# Altium PCB GSH_Bed v1.0.PcbDoc (part 6 of 6)
Units mil, origin at the board's own origin, x right, y up, seen from the top; angles counter-clockwise.
Board outline 4724.41 x 4921.3 mil, 2 copper layers (Top Layer, Bottom Layer); 2 components, 3 nets, 5 pads, 0 vias.
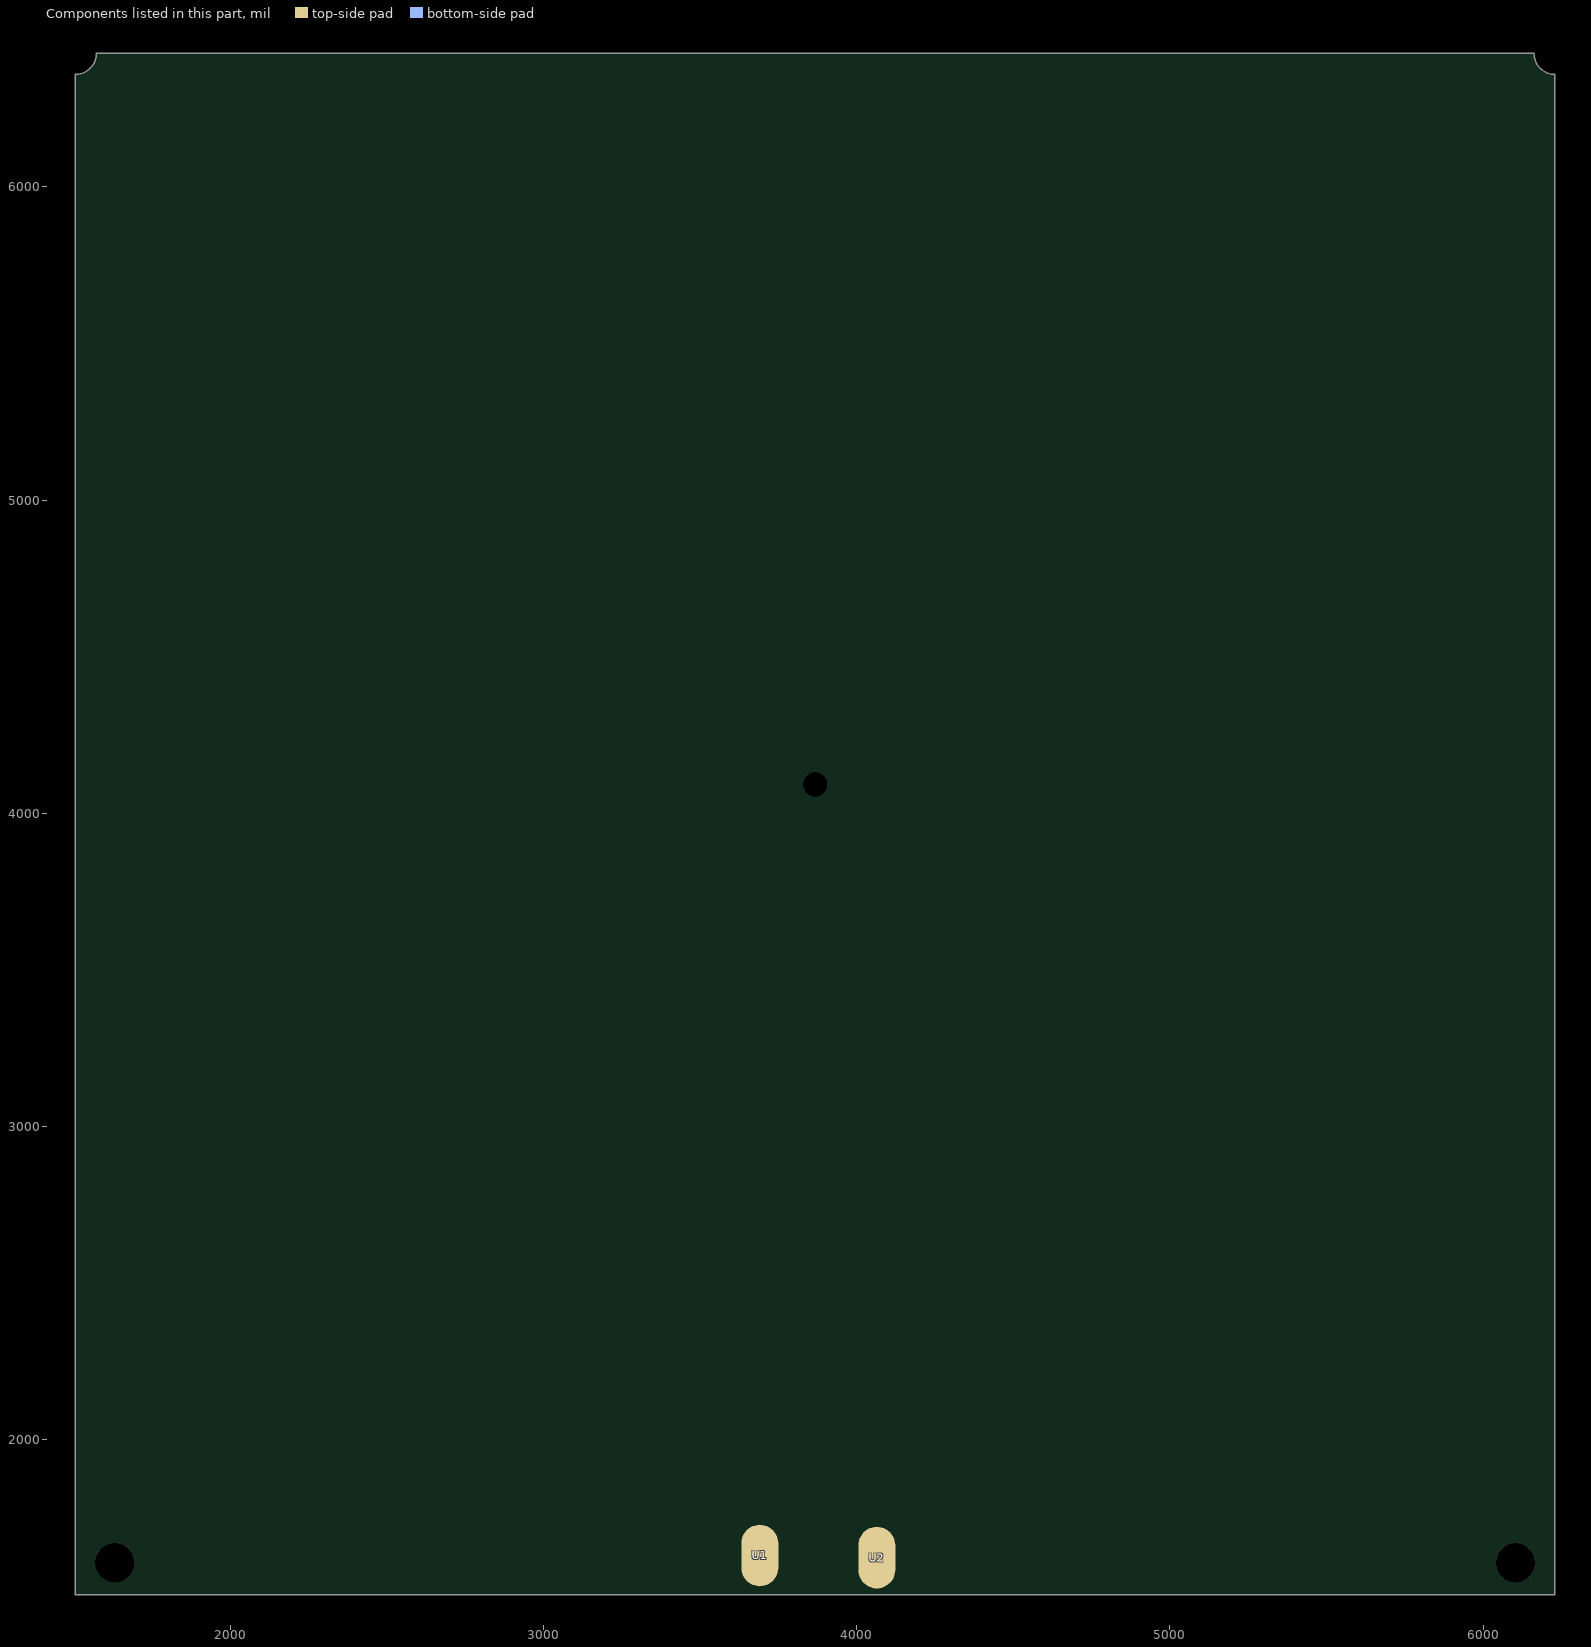
[diagram p6: the components of this part, seen from the top]

## Nets (pads, with @x,y where several pads share a name; then routed paths per layer and width w, separated by ;. In a path a pad name is that pad's centre, name@x,y a point inside that pad or via, vN(x,y) a via of type N, cw(c..) or ccw(c..) an arc to the next point about the centre after c; other vN are vias at no path point) (continued)
copper on no net: (continued)
  Top Layer w25.59: 5550.23,2788.33 5514.8,2788.33 5514.8,2823.77 5550.23,2823.77 5550.23,2894.62 5514.8,2894.62 5514.8,2859.2 5479.36,2859.2 5479.36,2894.62 5443.93,2894.62 5443.93,2823.77 5479.36,2823.77 5479.36,2788.33 5443.93,2788.33 5373.06,2788.33 5373.06,2823.77 5408.5,2823.77 5408.5,2894.64 5373.06,2894.64 5373.06,2859.2 5337.64,2859.2 5337.64,2894.64 5302.2,2894.64 5302.2,2823.77 5337.64,2823.77 5337.64,2788.34 5302.2,2788.34 5302.2,2717.47 5337.64,2717.47 5337.64,2752.9 5408.5,2752.9 5408.5,2717.47 5373.06,2717.47 5373.06,2682.04 5408.5,2682.04 5408.5,2646.6 5337.64,2646.6 5337.64,2682.04 5302.2,2682.04 5302.2,2646.6 5266.76,2646.6 5266.77,2682.03 5231.33,2682.03 5231.33,2646.6 5160.47,2646.6 5160.47,2682.03 5195.9,2682.03 5195.9,2717.47 5160.47,2717.47 5160.47,2752.9 5231.33,2752.9 5231.33,2717.47 5266.77,2717.47 5266.77,2788.33 5231.34,2788.33 5231.34,2823.77 5266.77,2823.77 5266.77,2894.64 5231.34,2894.64 5231.34,2859.2 5195.9,2859.2 5195.9,2894.64 5160.47,2894.64 5160.47,2823.77 5195.9,2823.77 5195.9,2788.34 5160.47,2788.34 5089.6,2788.34 5089.6,2823.78 5125.04,2823.78 5125.04,2894.64 5089.6,2894.64 5089.6,2859.21 5054.17,2859.21 5054.17,2894.64 5018.74,2894.64 5018.74,2823.78 5054.17,2823.78 5054.17,2788.34 5018.74,2788.34 5018.74,2717.48 5054.18,2717.48 5054.18,2752.91 5125.04,2752.91 5125.04,2717.48 5089.61,2717.48 5089.61,2682.04 5125.04,2682.04 5125.04,2646.61 5054.18,2646.61 5054.18,2682.04 5018.73,2682.04 5018.73,2646.61 5018.73,2611.18 5054.17,2611.18 5054.17,2575.74 5018.73,2575.74 5018.73,2504.87 5054.17,2504.87 5054.17,2540.3 5089.6,2540.3 5089.6,2504.87 5125.04,2504.87 5125.04,2575.74 5089.6,2575.74 5089.6,2611.17 5160.47,2611.17 5160.47,2575.74 5195.9,2575.74 5195.9,2611.17 5266.77,2611.17 5266.77,2575.74 5231.34,2575.74 5231.34,2540.31 5266.77,2540.31 5266.77,2504.87 5195.9,2504.87 5195.9,2540.31 5160.47,2540.31 5160.47,2469.44 5160.47,2434.01 5195.9,2434.01 5195.9,2469.45 5266.76,2469.45 5266.76,2434.01 5231.33,2434.01 5231.33,2398.57 5266.76,2398.57 5266.76,2363.14 5195.9,2363.14 5195.9,2398.57 5160.46,2398.57 5160.46,2363.14 5089.59,2363.14 5089.59,2398.58 5125.03,2398.58 5125.03,2469.45 5089.59,2469.45 5089.59,2434.01 5054.16,2434.01 5054.16,2469.45 5018.72,2469.45 5018.72,2398.58 5054.16,2398.58 5054.16,2363.15 5018.73,2363.15 5018.72,2292.28 5054.16,2292.28 5054.16,2327.72 5125.02,2327.72 5125.02,2292.28 5089.59,2292.28 5089.59,2256.85 5125.02,2256.85 5125.02,2221.42 5054.16,2221.42 5054.16,2256.85 5018.72,2256.85 5018.72,2185.99 5054.15,2185.98 5054.15,2150.54 5018.72,2150.54 5018.72,2079.68 5054.15,2079.68 5054.15,2115.11 5089.59,2115.11 5089.59,2079.68 5125.02,2079.68 5125.02,2150.54 5089.59,2150.54 5089.59,2185.98 5125.02,2185.98 5195.89,2185.98 5195.89,2150.54 5160.45,2150.54 5160.45,2079.67 5195.89,2079.67 5195.89,2115.11 5231.32,2115.11 5231.32,2079.67 5266.76,2079.67 5266.76,2150.54 5231.32,2150.54 5231.32,2185.97 5266.75,2185.97 5266.75,2256.84 5231.32,2256.84 5231.32,2221.41 5160.45,2221.41 5160.45,2256.84 5195.89,2256.84 5195.89,2292.27 5160.45,2292.27 5160.45,2327.71 5231.32,2327.71 5231.32,2292.27 5266.76,2292.27 5266.76,2327.71 5302.19,2327.71 5337.63,2327.71 5337.63,2292.27 5302.19,2292.27 5302.19,2221.4 5337.63,2221.4 5337.63,2256.84 5373.06,2256.84 5373.06,2221.4 5408.49,2221.4 5408.49,2292.27 5373.06,2292.27 5373.06,2327.7 5443.93,2327.7 5443.93,2292.27 5479.35,2292.27 5479.35,2327.71 5550.22,2327.71 5550.22,2292.27 5514.79,2292.27 5514.79,2256.84 5550.22,2256.84 5550.22,2221.4 5479.35,2221.4 5479.35,2256.84 5443.92,2256.84 5443.92,2185.97 5443.92,2150.54 5479.35,2150.54 5479.35,2185.97 5550.21,2185.97 5550.21,2150.54 5514.78,2150.54 5514.78,2115.11 5550.21,2115.11 5550.21,2079.67 5479.35,2079.67 5479.35,2115.11 5443.91,2115.11 5443.91,2079.67 5373.05,2079.67 5373.05,2115.11 5408.48,2115.11 5408.48,2185.97 5373.05,2185.97 5373.05,2150.54 5337.61,2150.54 5337.61,2185.97 5302.18,2185.97 5302.18,2115.11 5337.61,2115.11 5337.61,2079.68 5302.18,2079.68 5302.18,2044.25 5337.62,2044.25 5337.62,2008.81 5302.18,2008.81 5302.18,1937.95 5337.62,1937.95 5337.62,1973.38 5373.05,1973.38 5373.05,1937.95 5408.48,1937.95 5408.48,2008.81 5373.05,2008.81 5373.05,2044.24 5443.91,2044.24 5443.91,2008.81 5479.35,2008.81 5479.35,2044.24 5550.21,2044.24 5550.21,2008.81 5514.78,2008.81 5514.78,1973.38 5550.21,1973.38 5550.21,1937.95 5479.35,1937.95 5479.35,1973.38 5443.91,1973.38 5443.91,1902.51 5443.91,1867.08 5479.34,1867.08 5479.34,1902.52 5550.2,1902.52 5550.2,1867.08 5514.77,1867.08 5514.77,1831.65 5550.2,1831.65 5550.2,1796.21 5479.34,1796.21 5479.34,1831.65 5443.9,1831.65 5443.9,1796.21 5373.04,1796.21 5373.04,1831.65 5408.47,1831.65 5408.47,1902.52 5373.04,1902.52 5373.04,1867.09 5337.61,1867.09 5337.61,1902.52 5302.17,1902.52 5302.17,1831.65 5337.61,1831.65 5337.61,1796.22 5266.74,1796.22 5266.74,1831.65 5231.31,1831.65 5231.31,1796.22 5160.44,1796.22 5160.44,1831.65 5195.88,1831.65 5195.88,1867.09 5160.44,1867.09 5160.44,1902.52 5231.31,1902.52 5231.31,1867.09 5266.75,1867.09 5266.75,1937.95 5231.31,1937.95 5231.31,1973.39 5266.75,1973.39 5266.75,2044.25 5231.31,2044.25 5231.31,2008.82 5195.88,2008.82 5195.88,2044.25 5160.44,2044.25 5160.44,1973.39 5195.88,1973.39 5195.88,1937.95 5160.45,1937.95 5089.58,1937.95 5089.58,1973.39 5125.01,1973.39 5125.01,2044.26 5089.58,2044.26 5089.58,2008.83 5054.15,2008.83 5054.15,2044.26 5018.72,2044.26 5018.72,1973.39 5054.15,1973.39 5054.15,1937.96 5018.72,1937.96 5018.72,1867.1 5054.15,1867.1 5054.15,1902.53 5125.01,1902.53 5125.01,1867.1 5089.58,1867.1 5089.58,1831.66 5125.01,1831.66 5125.01,1796.23 5054.15,1796.23 5054.15,1831.66 5018.72,1831.66 5018.72,1796.23 4983.28,1796.23 4947.85,1796.23 4947.85,1831.67 4983.28,1831.67 4983.28,1902.53 4947.85,1902.53 4947.85,1867.1 4912.42,1867.1 4912.42,1902.53 4876.98,1902.53 4876.98,1831.67 4912.42,1831.67 4912.42,1796.23 4841.55,1796.23 4841.55,1831.67 4806.11,1831.67 4806.11,1796.23 4735.25,1796.23 4735.25,1831.67 4770.68,1831.67 4770.68,1867.1 4735.25,1867.1 4735.25,1902.53 4806.11,1902.53 4806.11,1867.1 4841.55,1867.1 4841.55,1937.96 4841.55,1973.39 4806.12,1973.39 4806.12,1937.96 4735.26,1937.96 4735.26,1973.39 4770.69,1973.39 4770.69,2008.83 4735.26,2008.83 4735.26,2044.26 4806.12,2044.26 4806.12,2008.83 4841.56,2008.83 4841.56,2044.26 4912.43,2044.26 4912.43,2008.82 4876.99,2008.82 4876.99,1937.96 4912.43,1937.96 4912.43,1973.39 4947.85,1973.39 4947.85,1937.96 4983.29,1937.96 4983.29,2008.82 4947.85,2008.82 4947.85,2044.26 4983.29,2044.25 4983.29,2115.12 4947.85,2115.12 4947.85,2079.69 4877,2079.69 4877,2115.12 4912.43,2115.12 4912.43,2150.55 4877,2150.55 4877,2185.99 4947.85,2185.99 4947.85,2150.55 4983.3,2150.55 4983.3,2221.42 4947.86,2221.42 4947.86,2256.86 4983.3,2256.86 4983.3,2327.72 4947.86,2327.72 4947.86,2292.29 4912.43,2292.29 4912.43,2327.72 4877,2327.72 4877,2256.86 4912.43,2256.86 4912.43,2221.43 4877,2221.43 4806.13,2221.43 4806.13,2256.87 4841.57,2256.87 4841.57,2327.73 4806.13,2327.73 4806.13,2292.3 4770.7,2292.3 4770.7,2327.73 4735.26,2327.73 4735.26,2256.87 4770.7,2256.87 4770.7,2221.43 4735.27,2221.43 4735.27,2150.56 4770.7,2150.56 4770.7,2186 4841.57,2186 4841.57,2150.56 4806.13,2150.56 4806.13,2115.13 4841.57,2115.13 4841.57,2079.7 4770.7,2079.7 4770.7,2115.13 4735.26,2115.13 4735.26,2079.7 4699.83,2079.7 4699.83,2115.13 4664.4,2115.13 4664.4,2079.69 4593.53,2079.69 4593.53,2115.13 4628.96,2115.13 4628.96,2150.56 4593.53,2150.56 4593.53,2186 4664.4,2186 4664.4,2150.56 4699.84,2150.56 4699.84,2221.43 4664.4,2221.43 4664.4,2256.87 4699.84,2256.87 4699.84,2327.73 4664.4,2327.73 4664.4,2292.3 4628.97,2292.3 4628.97,2327.73 4593.53,2327.73 4593.53,2256.87 4628.97,2256.87 4628.97,2221.43 4593.54,2221.43 4522.67,2221.43 4522.67,2256.87 4558.1,2256.87 4558.1,2327.74 4522.67,2327.74 4522.67,2292.31 4487.24,2292.31 4487.24,2327.74 4451.81,2327.74 4451.81,2256.87 4487.24,2256.87 4487.24,2221.44 4451.81,2221.44 4451.81,2150.57 4487.24,2150.57 4487.24,2186.01 4558.1,2186.01 4558.1,2150.57 4522.68,2150.57 4522.68,2115.14 4558.1,2115.14 4558.1,2079.7 4487.24,2079.7 4487.24,2115.14 4451.8,2115.14 4451.8,2079.7 4451.8,2044.27 4487.23,2044.27 4487.23,2008.83 4451.8,2008.83 4451.8,1937.97 4487.23,1937.97 4487.23,1973.4 4522.67,1973.4 4522.67,1937.97 4558.1,1937.97 4558.1,2008.83 4522.67,2008.83 4522.67,2044.26 4593.53,2044.26 4593.53,2008.83 4628.97,2008.83 4628.97,2044.27 4699.83,2044.27 4699.83,2008.83 4664.4,2008.83 4664.4,1973.4 4699.83,1973.4 4699.83,1937.97 4628.97,1937.97 4628.97,1973.4 4593.53,1973.4 4593.53,1902.54 4593.53,1867.11 4628.96,1867.11 4628.96,1902.54 4699.83,1902.54 4699.83,1867.11 4664.4,1867.11 4664.4,1831.67 4699.83,1831.67 4699.83,1796.24 4628.96,1796.24 4628.96,1831.67 4593.52,1831.67 4593.52,1796.24 4522.66,1796.24 4522.66,1831.68 4558.09,1831.68 4558.09,1902.54 4522.66,1902.54 4522.66,1867.11 4487.23,1867.11 4487.23,1902.54 4451.79,1902.54 4451.79,1831.68 4487.23,1831.68 4487.23,1796.24 4416.36,1796.25 4416.36,1831.68 4380.93,1831.68 4380.93,1796.24 4310.07,1796.24 4310.07,1831.68 4345.5,1831.68 4345.5,1867.11 4310.07,1867.11 4310.07,1902.55 4380.93,1902.55 4380.93,1867.11 4416.37,1867.11 4416.37,1937.97 4380.93,1937.97 4380.93,1973.41 4416.37,1973.41 4416.37,2044.28 4380.93,2044.28 4380.93,2008.85 4345.5,2008.85 4345.5,2044.28 4310.07,2044.28 4310.07,1973.41 4345.5,1973.41 4345.5,1937.98 4310.07,1937.98 4239.2,1937.98 4239.2,1973.42 4274.64,1973.42 4274.64,2044.28 4239.2,2044.28 4239.2,2008.85 4203.77,2008.85 4203.77,2044.28 4168.33,2044.28 4168.33,1973.42 4203.77,1973.42 4203.77,1937.98 4168.34,1937.98 4168.34,1867.12 4203.77,1867.12 4203.77,1902.56 4274.64,1902.56 4274.64,1867.12 4239.2,1867.12 4239.2,1831.69 4274.64,1831.69 4274.64,1796.25 4203.77,1796.25 4203.77,1831.69 4168.33,1831.69 4168.33,1796.25 4132.9,1796.25 4097.47,1796.25 4097.47,1831.69 4132.9,1831.69 4132.9,1902.56 4097.47,1902.56 4097.47,1867.12 4062.03,1867.12 4062.03,1902.56 4026.6,1902.56 4026.6,1831.69 4062.03,1831.69 4062.03,1796.26 3991.17,1796.26 3991.17,1831.69 3955.73,1831.69 3955.73,1796.26 3884.87,1796.26 3884.87,1831.69 3920.3,1831.69 3920.3,1867.12 3884.87,1867.12 3884.87,1902.56 3955.73,1902.56 3955.73,1867.12 3991.17,1867.12 3991.17,1937.99 3991.17,1973.42 3955.74,1973.42 3955.74,1937.98 3884.88,1937.98 3884.88,1973.42 3920.31,1973.42 3920.31,2008.85 3884.88,2008.85 3884.88,2044.29 3955.74,2044.29 3955.74,2008.85 3991.18,2008.85 3991.18,2044.29 4062.05,2044.29 4062.05,2008.85 4026.61,2008.85 4026.61,1937.98 4062.05,1937.98 4062.05,1973.41 4097.47,1973.41 4097.47,1937.98 4132.91,1937.98 4132.91,2008.85 4097.47,2008.85 4097.47,2044.28 4132.91,2044.28 4132.91,2079.71 4097.47,2079.71 4097.47,2115.15 4132.91,2115.15 4132.91,2186.02 4097.47,2186.02 4097.47,2150.58 4062.04,2150.58 4062.04,2186.02 4026.61,2186.02 4026.61,2115.15 4062.04,2115.15 4062.04,2079.72 3991.18,2079.72 3991.18,2115.15 3955.74,2115.15 3955.74,2079.71 3884.88,2079.71 3884.88,2115.15 3920.31,2115.15 3920.31,2150.58 3884.88,2150.58 3884.88,2186.02 3955.74,2186.02 3955.74,2150.58 3991.18,2150.58 3991.18,2221.45 3991.18,2256.88 3955.75,2256.88 3955.75,2221.45 3884.88,2221.45 3884.88,2256.88 3920.31,2256.88 3920.31,2292.31 3884.88,2292.31 3884.88,2327.74 3955.75,2327.74 3955.75,2292.31 3991.18,2292.31 3991.18,2327.74 4062.05,2327.74 4062.05,2292.31 4026.61,2292.31 4026.61,2221.45 4062.05,2221.45 4062.05,2256.88 4097.48,2256.88 4097.48,2221.45 4132.92,2221.45 4132.92,2292.31 4097.48,2292.31 4097.48,2327.74 4168.35,2327.74 4168.35,2292.31 4203.78,2292.31 4203.78,2327.74 4274.64,2327.74 4274.64,2292.31 4239.21,2292.31 4239.21,2256.88 4274.64,2256.88 4274.64,2221.44 4203.78,2221.44 4203.78,2256.88 4168.34,2256.88 4168.34,2186.01 4203.78,2186.01 4203.78,2150.57 4168.34,2150.57 4168.34,2079.71 4203.78,2079.71 4203.78,2115.14 4239.21,2115.14 4239.21,2079.71 4274.64,2079.71 4274.64,2150.57 4239.21,2150.57 4239.21,2186 4274.64,2186 4345.51,2186 4345.51,2150.56 4310.07,2150.56 4310.07,2079.7 4345.51,2079.7 4345.51,2115.13 4380.94,2115.13 4380.94,2079.7 4416.38,2079.7 4416.38,2150.56 4380.94,2150.56 4380.94,2186 4416.37,2186 4416.37,2256.87 4380.94,2256.87 4380.94,2221.43 4310.07,2221.43 4310.07,2256.87 4345.51,2256.87 4345.51,2292.3 4310.07,2292.3 4310.07,2327.73 4380.94,2327.73 4380.94,2292.3 4416.38,2292.3 4416.38,2327.73 4416.39,2398.59 4380.95,2398.59 4380.95,2363.16 4310.09,2363.16 4310.09,2398.59 4345.52,2398.59 4345.52,2434.03 4310.09,2434.03 4310.09,2469.47 4380.95,2469.47 4380.95,2434.03 4416.39,2434.03 4416.39,2504.9 4380.96,2504.9 4380.96,2540.34 4416.39,2540.34 4416.39,2611.2 4380.96,2611.2 4380.96,2575.77 4345.52,2575.77 4345.52,2611.2 4310.09,2611.2 4310.09,2540.34 4345.52,2540.34 4345.52,2504.9 4310.09,2504.9 4239.22,2504.9 4239.22,2540.34 4274.66,2540.34 4274.66,2611.21 4239.22,2611.21 4239.22,2575.78 4203.79,2575.78 4203.79,2611.21 4168.36,2611.21 4168.36,2540.34 4203.79,2540.34 4203.79,2504.91 4168.36,2504.91 4168.36,2434.04 4203.79,2434.04 4203.79,2469.48 4274.66,2469.48 4274.66,2434.04 4239.22,2434.04 4239.22,2398.61 4274.66,2398.61 4274.66,2363.17 4203.79,2363.17 4203.79,2398.61 4168.35,2398.61 4168.35,2363.17 4132.92,2363.17 4097.49,2363.17 4097.49,2398.61 4132.92,2398.61 4132.92,2469.48 4097.49,2469.48 4097.49,2434.04 4062.05,2434.04 4062.05,2469.48 4026.62,2469.48 4026.62,2398.61 4062.05,2398.61 4062.05,2363.18 3991.19,2363.18 3991.19,2398.61 3955.76,2398.61 3955.76,2363.18 3884.89,2363.18 3884.89,2398.61 3920.32,2398.61 3920.32,2434.04 3884.89,2434.04 3884.89,2469.48 3955.76,2469.48 3955.76,2434.04 3991.2,2434.04 3991.2,2504.91 3991.2,2540.34 3955.76,2540.34 3955.76,2504.91 3884.9,2504.91 3884.9,2540.34 3920.33,2540.34 3920.33,2575.78 3884.9,2575.78 3884.9,2611.21 3955.76,2611.21 3955.76,2575.78 3991.2,2575.78 3991.2,2611.21 4062.06,2611.21 4062.06,2575.77 4026.63,2575.77 4026.63,2504.91 4062.06,2504.91 4062.06,2540.34 4097.5,2540.34 4097.5,2504.91 4132.93,2504.91 4132.93,2575.77 4097.5,2575.77 4097.5,2611.21 4132.93,2611.2 4132.93,2646.64 4097.49,2646.64 4097.49,2682.08 4132.93,2682.08 4132.93,2752.94 4097.49,2752.94 4097.49,2717.51 4062.06,2717.51 4062.06,2752.94 4026.63,2752.94 4026.63,2682.08 4062.06,2682.08 4062.06,2646.64 3991.2,2646.64 3991.2,2682.07 3955.76,2682.07 3955.76,2646.64 3884.9,2646.64 3884.9,2682.07 3920.33,2682.07 3920.33,2717.51 3884.9,2717.51 3884.9,2752.94 3955.76,2752.94 3955.76,2717.51 3991.2,2717.51 3991.2,2788.37 3991.2,2823.8 3955.76,2823.8 3955.76,2788.37 3884.91,2788.37 3884.91,2823.8 3920.34,2823.8 3920.34,2859.24 3884.91,2859.24 3884.91,2894.67 3955.76,2894.67 3955.76,2859.24 3991.2,2859.24 3991.2,2894.67 4062.07,2894.67 4062.07,2859.23 4026.64,2859.23 4026.64,2788.37 4062.07,2788.37 4062.07,2823.8 4097.5,2823.8 4097.5,2788.37 4132.94,2788.37 4132.94,2859.23 4097.5,2859.23 4097.5,2894.66 4168.37,2894.66 4168.37,2859.23 4203.8,2859.23 4203.8,2894.66 4274.67,2894.66 4274.67,2859.23 4239.24,2859.23 4239.24,2823.8 4274.67,2823.8 4274.67,2788.36 4203.8,2788.36 4203.8,2823.8 4168.36,2823.8 4168.36,2752.94 4203.8,2752.93 4203.8,2717.49 4168.36,2717.49 4168.36,2646.63 4203.8,2646.63 4203.8,2682.06 4239.23,2682.06 4239.23,2646.63 4274.67,2646.63 4274.67,2717.49 4239.23,2717.49 4239.23,2752.93 4274.66,2752.93 4345.53,2752.93 4345.53,2717.49 4310.1,2717.49 4310.1,2646.62 4345.53,2646.62 4345.53,2682.06 4380.96,2682.06 4380.96,2646.62 4416.4,2646.62 4416.4,2717.49 4380.96,2717.49 4380.96,2752.92 4416.4,2752.92 4416.4,2823.79 4380.96,2823.79 4380.96,2788.36 4310.1,2788.36 4310.1,2823.79 4345.53,2823.79 4345.53,2859.22 4310.1,2859.22 4310.1,2894.65 4380.96,2894.65 4380.96,2859.22 4416.4,2859.22 4416.4,2894.65 4451.83,2894.65 4487.26,2894.65 4487.26,2859.22 4451.83,2859.22 4451.83,2788.35 4487.26,2788.35 4487.26,2823.78 4522.69,2823.78 4522.69,2788.35 4558.13,2788.35 4558.13,2859.22 4522.69,2859.22 4522.69,2894.65 4593.56,2894.65 4593.56,2859.22 4629,2859.22 4629,2894.65 4699.86,2894.65 4699.86,2859.22 4664.43,2859.22 4664.43,2823.78 4699.86,2823.78 4699.86,2788.35 4629,2788.35 4629,2823.78 4593.56,2823.78 4593.56,2752.92 4593.56,2717.49 4628.99,2717.49 4628.99,2752.92 4699.85,2752.92 4699.85,2717.49 4664.42,2717.49 4664.42,2682.05 4699.85,2682.05 4699.85,2646.62 4628.99,2646.62 4628.99,2682.05 4593.55,2682.05 4593.55,2646.62 4522.68,2646.62 4522.68,2682.06 4558.12,2682.06 4558.12,2752.92 4522.68,2752.92 4522.68,2717.49 4487.26,2717.49 4487.26,2752.92 4451.82,2752.92 4451.82,2682.06 4487.26,2682.06 4487.26,2646.62 4451.82,2646.63 4451.82,2575.76 4487.26,2575.76 4487.26,2611.19 4558.11,2611.19 4558.11,2575.76 4522.68,2575.76 4522.68,2540.33 4558.11,2540.33 4558.11,2504.89 4487.26,2504.89 4487.26,2540.33 4451.81,2540.33 4451.81,2469.46 4487.25,2469.46 4487.25,2434.02 4451.81,2434.02 4451.81,2363.16 4487.25,2363.16 4487.25,2398.59 4522.68,2398.59 4522.68,2363.16 4558.11,2363.16 4558.11,2434.02 4522.68,2434.02 4522.68,2469.45 4558.11,2469.45 4628.98,2469.45 4628.98,2434.01 4593.54,2434.01 4593.54,2363.15 4628.98,2363.15 4628.98,2398.58 4664.41,2398.58 4664.41,2363.15 4699.85,2363.15 4699.85,2434.01 4664.41,2434.01 4664.41,2469.45 4699.84,2469.45 4699.84,2540.32 4664.41,2540.32 4664.41,2504.88 4593.54,2504.88 4593.54,2540.32 4628.98,2540.32 4628.98,2575.75 4593.54,2575.75 4593.54,2611.18 4664.41,2611.18 4664.41,2575.75 4699.85,2575.75 4699.85,2611.18 4735.28,2611.18 4735.28,2575.75 4770.71,2575.75 4770.71,2611.18 4841.58,2611.18 4841.58,2575.75 4806.15,2575.75 4806.15,2540.32 4841.58,2540.32 4841.58,2504.88 4770.71,2504.88 4770.71,2540.32 4735.27,2540.32 4735.27,2469.45 4770.71,2469.45 4770.71,2434.01 4735.27,2434.01 4735.27,2363.15 4770.71,2363.15 4770.71,2398.58 4806.14,2398.58 4806.14,2363.15 4841.58,2363.15 4841.58,2434.01 4806.14,2434.01 4806.14,2469.45 4841.57,2469.45 4912.44,2469.45 4912.44,2434.01 4877.01,2434.01 4877.01,2363.14 4912.44,2363.14 4912.44,2398.57 4947.87,2398.57 4947.87,2363.14 4983.3,2363.14 4983.3,2434.01 4947.87,2434.01 4947.87,2469.45 4983.3,2469.45 4983.3,2540.31 4947.87,2540.31 4947.87,2504.87 4877.01,2504.87 4877.01,2540.31 4912.44,2540.31 4912.44,2575.74 4877.01,2575.74 4877.01,2611.18 4947.87,2611.18 4947.87,2575.74 4983.31,2575.74 4983.31,2611.18 4983.31,2646.61 4947.88,2646.61 4947.88,2682.05 4983.31,2682.05 4983.31,2752.91 4947.88,2752.91 4947.88,2717.48 4912.44,2717.48 4912.44,2752.91 4877.01,2752.91 4877.01,2682.05 4912.44,2682.05 4912.44,2646.62 4841.58,2646.62 4841.58,2682.05 4806.14,2682.05 4806.14,2646.61 4735.28,2646.61 4735.28,2682.05 4770.71,2682.05 4770.71,2717.48 4735.28,2717.48 4735.28,2752.91 4806.14,2752.91 4806.14,2717.48 4841.58,2717.48 4841.58,2788.35 4841.58,2823.78 4806.15,2823.78 4806.15,2788.34 4735.28,2788.34 4735.28,2823.78 4770.71,2823.78 4770.71,2859.21 4735.28,2859.21 4735.28,2894.64 4806.15,2894.64 4806.15,2859.21 4841.59,2859.21 4841.59,2894.64 4912.45,2894.64 4912.45,2859.2 4877.02,2859.2 4877.02,2788.34 4912.45,2788.34 4912.45,2823.77 4947.88,2823.77 4947.88,2788.34 4983.32,2788.34 4983.32,2859.2 4947.88,2859.2 4947.88,2894.64 4983.31,2894.64 4983.31,2930.07 4947.88,2930.07 4947.88,2965.5 4983.31,2965.5 4983.31,3036.37 4947.88,3036.37 4947.88,3000.94 4912.45,3000.94 4912.45,3036.37 4877.02,3036.37 4877.02,2965.5 4912.45,2965.5 4912.45,2930.07 4841.59,2930.07 4841.59,2965.5 4806.15,2965.5 4806.15,2930.07 4735.29,2930.07 4735.29,2965.5 4770.72,2965.5 4770.72,3000.93 4735.29,3000.93 4735.29,3036.37 4806.15,3036.37 4806.15,3000.93 4841.59,3000.93 4841.59,3071.8 4841.59,3107.23 4806.15,3107.23 4806.15,3071.8 4735.29,3071.8 4735.29,3107.23 4770.72,3107.23 4770.72,3142.67 4735.29,3142.67 4735.29,3178.1 4806.15,3178.1 4806.15,3142.67 4841.59,3142.67 4841.59,3178.1 4912.46,3178.1 4912.46,3142.66 4877.02,3142.66 4877.02,3071.8 4912.46,3071.8 4912.46,3107.23 4947.89,3107.23 4947.89,3071.8 4983.33,3071.8 4983.33,3142.66 4947.89,3142.66 4947.89,3178.1 4983.32,3178.09 4983.33,3248.96 4947.89,3248.96 4947.89,3213.53 4877.03,3213.53 4877.03,3248.96 4912.46,3248.96 4912.46,3284.39 4877.03,3284.39 4877.03,3319.82 4947.89,3319.82 4947.89,3284.39 4983.33,3284.39 4983.33,3355.26 4947.89,3355.26 4947.89,3390.7 4983.33,3390.7 4983.33,3461.56 4947.89,3461.56 4947.89,3426.13 4912.47,3426.13 4912.47,3461.56 4877.03,3461.56 4877.03,3390.7 4912.47,3390.7 4912.47,3355.26 4877.03,3355.26 4806.17,3355.26 4806.17,3390.7 4841.6,3390.7 4841.6,3461.57 4806.17,3461.57 4806.17,3426.13 4770.73,3426.13 4770.73,3461.57 4735.3,3461.57 4735.3,3390.7 4770.73,3390.7 4770.73,3355.27 4735.3,3355.27 4735.3,3284.4 4770.74,3284.4 4770.74,3319.84 4841.6,3319.84 4841.6,3284.4 4806.17,3284.4 4806.17,3248.97 4841.6,3248.97 4841.6,3213.54 4770.74,3213.54 4770.74,3248.97 4735.3,3248.97 4735.3,3213.54 4699.86,3213.54 4699.87,3248.97 4664.43,3248.97 4664.43,3213.53 4593.57,3213.53 4593.57,3248.97 4629,3248.97 4629,3284.4 4593.57,3284.4 4593.57,3319.84 4664.43,3319.84 4664.43,3284.4 4699.87,3284.4 4699.87,3355.26 4664.44,3355.26 4664.44,3390.7 4699.87,3390.7 4699.87,3461.57 4664.44,3461.57 4664.44,3426.14 4629.01,3426.14 4629.01,3461.57 4593.57,3461.57 4593.57,3390.7 4629.01,3390.7 4629.01,3355.27 4593.57,3355.27 4522.71,3355.27 4522.71,3390.71 4558.14,3390.71 4558.14,3461.57 4522.71,3461.57 4522.71,3426.14 4487.27,3426.14 4487.27,3461.57 4451.84,3461.57 4451.84,3390.71 4487.27,3390.71 4487.27,3355.28 4451.84,3355.28 4451.84,3284.41 4487.27,3284.41 4487.27,3319.84 4558.14,3319.84 4558.14,3284.41 4522.71,3284.41 4522.71,3248.98 4558.14,3248.98 4558.14,3213.54 4487.27,3213.54 4487.27,3248.98 4451.84,3248.98 4451.84,3213.54 4451.84,3178.11 4487.27,3178.11 4487.27,3142.67 4451.84,3142.67 4451.84,3071.81 4487.27,3071.81 4487.27,3107.24 4522.7,3107.24 4522.7,3071.81 4558.14,3071.81 4558.14,3142.67 4522.7,3142.67 4522.7,3178.1 4593.57,3178.1 4593.57,3142.67 4629.01,3142.67 4629.01,3178.11 4699.87,3178.11 4699.87,3142.67 4664.44,3142.67 4664.44,3107.24 4699.87,3107.24 4699.87,3071.81 4629.01,3071.81 4629.01,3107.24 4593.56,3107.24 4593.56,3036.37 4593.56,3000.94 4629,3000.94 4629,3036.38 4699.86,3036.38 4699.86,3000.94 4664.43,3000.94 4664.43,2965.51 4699.86,2965.51 4699.86,2930.07 4629,2930.07 4629,2965.51 4593.56,2965.51 4593.56,2930.07 4522.69,2930.07 4522.69,2965.51 4558.13,2965.51 4558.13,3036.38 4522.69,3036.38 4522.69,3000.95 4487.26,3000.95 4487.26,3036.38 4451.83,3036.38 4451.83,2965.51 4487.26,2965.51 4487.26,2930.08 4416.4,2930.08 4416.4,2965.51 4380.97,2965.51 4380.97,2930.08 4310.1,2930.08 4310.1,2965.51 4345.53,2965.51 4345.53,3000.95 4310.1,3000.95 4310.1,3036.38 4380.97,3036.38 4380.97,3000.95 4416.4,3000.95 4416.4,3071.81 4380.97,3071.81 4380.97,3107.25 4416.4,3107.25 4416.4,3178.12 4380.97,3178.12 4380.97,3142.69 4345.54,3142.69 4345.54,3178.12 4310.1,3178.12 4310.1,3107.25 4345.54,3107.25 4345.54,3071.82 4310.11,3071.82 4239.24,3071.82 4239.24,3107.26 4274.67,3107.26 4274.67,3178.12 4239.24,3178.12 4239.24,3142.69 4203.8,3142.69 4203.8,3178.12 4168.37,3178.12 4168.37,3107.26 4203.8,3107.26 4203.8,3071.82 4168.38,3071.82 4168.38,3000.96 4203.81,3000.96 4203.81,3036.39 4274.67,3036.39 4274.67,3000.96 4239.24,3000.96 4239.24,2965.52 4274.67,2965.52 4274.67,2930.09 4203.81,2930.09 4203.81,2965.52 4168.37,2965.52 4168.37,2930.09 4132.94,2930.09 4097.5,2930.09 4097.5,2965.53 4132.93,2965.53 4132.93,3036.39 4097.5,3036.39 4097.5,3000.96 4062.07,3000.96 4062.07,3036.39 4026.63,3036.39 4026.63,2965.53 4062.07,2965.53 4062.07,2930.09 3991.2,2930.09 3991.2,2965.53 3955.76,2965.53 3955.76,2930.09 3884.9,2930.09 3884.9,2965.53 3920.34,2965.53 3920.34,3000.96 3884.9,3000.96 3884.9,3036.39 3955.76,3036.39 3955.76,3000.96 3991.21,3000.96 3991.21,3071.83 3991.21,3107.26 3955.77,3107.26 3955.77,3071.82 3884.91,3071.82 3884.91,3107.26 3920.34,3107.26 3920.34,3142.69 3884.91,3142.69 3884.91,3178.13 3955.77,3178.13 3955.77,3142.69 3991.22,3142.69 3991.22,3178.13 4062.08,3178.13 4062.08,3142.69 4026.64,3142.69 4026.64,3071.82 4062.08,3071.82 4062.08,3107.25 4097.51,3107.25 4097.51,3071.82 4132.94,3071.82 4132.94,3142.69 4097.51,3142.69 4097.51,3178.12 4132.94,3178.12 4132.94,3213.55 4097.51,3213.55 4097.51,3248.99 4132.94,3248.99 4132.94,3319.86 4097.51,3319.86 4097.51,3284.42 4062.08,3284.42 4062.08,3319.86 4026.64,3319.86 4026.64,3248.99 4062.08,3248.99 4062.08,3213.56 3991.21,3213.56 3991.21,3248.99 3955.78,3248.99 3955.78,3213.55 3884.91,3213.55 3884.91,3248.99 3920.34,3248.99 3920.34,3284.42 3884.91,3284.42 3884.91,3319.86 3955.78,3319.86 3955.78,3284.42 3991.22,3284.42 3991.22,3355.28 3991.22,3390.72 3955.78,3390.72 3955.78,3355.28 3884.92,3355.28 3884.92,3390.72 3920.34,3390.72 3920.34,3426.15 3884.92,3426.15 3884.92,3461.58 3955.78,3461.58 3955.78,3426.15 3991.22,3426.15 3991.22,3461.58 4062.09,3461.58 4062.09,3426.14 4026.65,3426.14 4026.65,3355.28 4062.09,3355.28 4062.09,3390.71 4097.52,3390.71 4097.52,3355.28 4132.95,3355.28 4132.95,3426.14 4097.52,3426.14 4097.52,3461.58 4168.38,3461.58 4168.38,3426.14 4203.82,3426.14 4203.82,3461.58 4274.68,3461.58 4274.68,3426.14 4239.25,3426.14 4239.25,3390.71 4274.68,3390.71 4274.68,3355.28 4203.82,3355.28 4203.82,3390.71 4168.38,3390.71 4168.38,3319.85 4203.81,3319.84 4203.81,3284.41 4168.38,3284.41 4168.38,3213.55 4203.81,3213.55 4203.81,3248.98 4239.25,3248.98 4239.25,3213.55 4274.68,3213.55 4274.68,3284.41 4239.25,3284.41 4239.25,3319.84 4274.68,3319.84 4345.55,3319.84 4345.55,3284.4 4310.11,3284.4 4310.11,3213.54 4345.55,3213.54 4345.55,3248.97 4380.98,3248.97 4380.98,3213.54 4416.41,3213.54 4416.41,3284.4 4380.98,3284.4 4380.98,3319.84 4416.4,3319.84 4416.4,3390.7 4380.97,3390.7 4380.97,3355.27 4310.11,3355.27 4310.11,3390.7 4345.54,3390.7 4345.54,3426.13 4310.11,3426.13 4310.11,3461.57 4380.97,3461.57 4380.97,3426.13 4416.41,3426.13 4416.41,3461.57 4416.42,3532.43 4380.98,3532.43 4380.98,3497 4310.13,3497 4310.13,3532.43 4345.55,3532.43 4345.55,3567.87 4310.13,3567.87 4310.13,3603.31 4380.98,3603.31 4380.98,3567.87 4416.43,3567.87 4416.43,3638.74 4380.99,3638.74 4380.99,3674.18 4416.43,3674.18 4416.43,3745.04 4380.99,3745.04 4380.99,3709.61 4345.56,3709.61 4345.56,3745.04 4310.13,3745.04 4310.13,3674.18 4345.56,3674.18 4345.56,3638.74 4310.13,3638.74 4239.26,3638.74 4239.26,3674.18 4274.69,3674.18 4274.69,3745.05 4239.26,3745.05 4239.26,3709.61 4203.83,3709.61 4203.83,3745.05 4168.39,3745.05 4168.39,3674.18 4203.83,3674.18 4203.83,3638.75 4168.4,3638.75 4168.4,3567.88 4203.83,3567.88 4203.83,3603.32 4274.69,3603.32 4274.69,3567.88 4239.26,3567.88 4239.26,3532.44 4274.69,3532.44 4274.69,3497.01 4203.83,3497.01 4203.83,3532.44 4168.39,3532.44 4168.39,3497.01 4132.96,3497.01 4097.52,3497.01 4097.52,3532.45 4132.96,3532.45 4132.96,3603.32 4097.52,3603.32 4097.52,3567.88 4062.09,3567.88 4062.09,3603.32 4026.65,3603.32 4026.65,3532.45 4062.09,3532.45 4062.09,3497.01 3991.22,3497.01 3991.22,3532.45 3955.79,3532.45 3955.79,3497.01 3884.93,3497.01 3884.93,3532.45 3920.36,3532.45 3920.36,3567.88 3884.93,3567.88 3884.93,3603.32 3955.79,3603.32 3955.79,3567.88 3991.23,3567.88 3991.23,3638.75 3991.23,3674.18 3955.8,3674.18 3955.8,3638.75 3884.93,3638.75 3884.93,3674.18 3920.36,3674.18 3920.36,3709.61 3884.93,3709.61 3884.93,3745.05 3955.8,3745.05 3955.8,3709.61 3991.23,3709.61 3991.23,3745.05 4062.1,3745.05 4062.1,3709.61 4026.67,3709.61 4026.67,3638.75 4062.1,3638.75 4062.1,3674.18 4097.53,3674.18 4097.53,3638.75 4132.97,3638.75 4132.97,3709.61 4097.53,3709.61 4097.53,3745.05 4132.97,3745.04 4132.97,3780.47 4097.53,3780.47 4097.53,3815.91 4132.97,3815.91 4132.97,3886.78 4097.53,3886.78 4097.53,3851.34 4062.1,3851.34 4062.1,3886.78 4026.66,3886.78 4026.66,3815.91 4062.1,3815.91 4062.1,3780.48 3991.23,3780.48 3991.23,3815.91 3955.8,3815.91 3955.8,3780.47 3884.93,3780.47 3884.93,3815.91 3920.36,3815.91 3920.36,3851.34 3884.93,3851.34 3884.93,3886.78 3955.8,3886.78 3955.8,3851.34 3991.23,3851.34 3991.23,3922.21 3991.23,3957.64 3955.8,3957.64 3955.8,3922.21 3884.94,3922.21 3884.94,3957.64 3920.37,3957.64 3920.37,3993.07 3884.94,3993.07 3884.94,4028.51 3955.8,4028.51 3955.8,3993.07 3991.24,3993.07 3991.24,4028.51 4062.11,4028.51 4062.11,3993.07 4026.67,3993.07 4026.67,3922.21 4062.11,3922.21 4062.11,3957.64 4097.54,3957.64 4097.54,3922.21 4132.97,3922.21 4132.97,3993.07 4097.54,3993.07 4097.54,4028.5 4168.41,4028.5 4168.4,3993.07 4203.84,3993.07 4203.84,4028.5 4274.7,4028.5 4274.7,3993.07 4239.27,3993.07 4239.27,3957.64 4274.7,3957.64 4274.7,3922.2 4203.84,3922.2 4203.84,3957.64 4168.4,3957.64 4168.4,3886.77 4203.84,3886.77 4203.84,3851.33 4168.4,3851.33 4168.4,3780.47 4203.84,3780.47 4203.84,3815.9 4239.27,3815.9 4239.27,3780.47 4274.7,3780.47 4274.7,3851.33 4239.27,3851.33 4239.27,3886.76 4274.7,3886.76 4345.56,3886.76 4345.56,3851.32 4310.13,3851.32 4310.13,3780.46 4345.56,3780.46 4345.56,3815.89 4381,3815.89 4381,3780.46 4416.43,3780.46 4416.43,3851.32 4381,3851.32 4381,3886.76 4416.43,3886.76 4416.43,3957.63 4380.99,3957.63 4380.99,3922.19 4310.13,3922.19 4310.13,3957.63 4345.56,3957.63 4345.56,3993.06 4310.13,3993.06 4310.13,4028.49 4380.99,4028.49 4380.99,3993.06 4416.43,3993.06 4416.43,4028.49 4451.86,4028.49 4487.3,4028.49 4487.3,3993.05 4451.86,3993.05 4451.86,3922.19 4487.3,3922.19 4487.3,3957.62 4522.73,3957.62 4522.73,3922.19 4558.16,3922.19 4558.16,3993.05 4522.73,3993.05 4522.73,4028.49 4593.6,4028.49 4593.6,3993.05 4629.03,3993.05 4629.03,4028.49 4699.9,4028.49 4699.9,3993.05 4664.46,3993.05 4664.46,3957.62 4699.9,3957.62 4699.9,3922.19 4629.03,3922.19 4629.03,3957.62 4593.59,3957.62 4593.59,3886.75 4593.59,3851.32 4629.03,3851.32 4629.03,3886.76 4699.89,3886.76 4699.89,3851.32 4664.46,3851.32 4664.46,3815.89 4699.89,3815.89 4699.89,3780.45 4629.03,3780.45 4629.03,3815.89 4593.59,3815.89 4593.59,3780.45 4522.72,3780.45 4522.72,3815.89 4558.15,3815.89 4558.15,3886.76 4522.72,3886.76 4522.72,3851.33 4487.29,3851.33 4487.29,3886.76 4451.85,3886.76 4451.85,3815.89 4487.29,3815.89 4487.29,3780.46 4451.85,3780.47 4451.85,3709.6 4487.29,3709.6 4487.29,3745.03 4558.15,3745.03 4558.15,3709.6 4522.72,3709.6 4522.72,3674.17 4558.15,3674.17 4558.15,3638.73 4487.29,3638.73 4487.29,3674.17 4451.85,3674.17 4451.85,3603.3 4487.28,3603.3 4487.28,3567.86 4451.85,3567.86 4451.85,3496.99 4487.28,3496.99 4487.28,3532.42 4522.71,3532.42 4522.71,3496.99 4558.15,3496.99 4558.15,3567.86 4522.71,3567.86 4522.71,3603.29 4558.15,3603.29 4629.01,3603.29 4629.01,3567.85 4593.58,3567.85 4593.58,3496.99 4629.01,3496.99 4629.01,3532.42 4664.45,3532.42 4664.45,3496.99 4699.88,3496.99 4699.88,3567.85 4664.45,3567.85 4664.45,3603.29 4699.88,3603.29 4699.88,3674.16 4664.44,3674.16 4664.44,3638.72 4593.58,3638.72 4593.58,3674.16 4629.01,3674.16 4629.01,3709.59 4593.58,3709.59 4593.58,3745.02 4664.44,3745.02 4664.44,3709.59 4699.88,3709.59 4699.88,3745.02 4735.32,3745.02 4735.31,3709.59 4770.75,3709.59 4770.75,3745.02 4841.61,3745.02 4841.61,3709.59 4806.18,3709.59 4806.18,3674.16 4841.61,3674.16 4841.61,3638.72 4770.75,3638.72 4770.75,3674.16 4735.31,3674.16 4735.31,3603.29 4770.74,3603.29 4770.74,3567.85 4735.31,3567.85 4735.31,3496.99 4770.74,3496.99 4770.74,3532.42 4806.18,3532.42 4806.18,3496.99 4841.61,3496.99 4841.61,3567.85 4806.18,3567.85 4806.18,3603.29 4841.6,3603.29 4912.47,3603.29 4912.47,3567.84 4877.04,3567.84 4877.04,3496.98 4912.47,3496.98 4912.47,3532.41 4947.9,3532.41 4947.9,3496.98 4983.34,3496.98 4983.34,3567.84 4947.9,3567.84 4947.9,3603.28 4983.34,3603.28 4983.34,3674.15 4947.9,3674.15 4947.9,3638.71 4877.04,3638.71 4877.04,3674.15 4912.47,3674.15 4912.47,3709.58 4877.04,3709.58 4877.04,3745.02 4947.9,3745.02 4947.9,3709.58 4983.34,3709.58 4983.34,3745.02 4983.34,3780.45 4947.91,3780.45 4947.91,3815.89 4983.34,3815.89 4983.34,3886.75 4947.91,3886.75 4947.91,3851.32 4912.47,3851.32 4912.47,3886.75 4877.04,3886.75 4877.04,3815.89 4912.47,3815.89 4912.47,3780.45 4841.61,3780.45 4841.61,3815.89 4806.18,3815.89 4806.18,3780.45 4735.31,3780.45 4735.31,3815.89 4770.74,3815.89 4770.74,3851.32 4735.31,3851.32 4735.31,3886.75 4806.18,3886.75 4806.18,3851.32 4841.61,3851.32 4841.61,3922.18 4841.61,3957.61 4806.18,3957.61 4806.18,3922.18 4735.32,3922.18 4735.32,3957.61 4770.75,3957.61 4770.75,3993.05 4735.32,3993.05 4735.32,4028.48 4806.18,4028.48 4806.18,3993.05 4841.62,3993.05 4841.62,4028.48 4912.48,4028.48 4912.48,3993.04 4877.05,3993.04 4877.05,3922.18 4912.48,3922.18 4912.48,3957.61 4947.92,3957.61 4947.92,3922.18 4983.35,3922.18 4983.35,3993.04 4947.92,3993.04 4947.92,4028.48 5018.78,4028.47 5018.78,3993.03 5054.21,3993.03 5054.21,4028.47 5125.08,4028.47 5125.08,3993.03 5089.65,3993.03 5089.65,3957.6 5125.08,3957.6 5125.08,3922.16 5054.21,3922.16 5054.21,3957.6 5018.77,3957.6 5018.77,3886.74 5054.21,3886.74 5054.21,3851.3 5018.77,3851.3 5018.77,3780.44 5054.21,3780.44 5054.21,3815.86 5089.64,3815.86 5089.64,3780.44 5125.08,3780.44 5125.08,3851.3 5089.64,3851.3 5089.64,3886.73 5125.07,3886.73 5195.94,3886.73 5195.94,3851.29 5160.51,3851.29 5160.51,3780.43 5195.94,3780.43 5195.94,3815.86 5231.37,3815.86 5231.37,3780.43 5266.81,3780.43 5266.81,3851.29 5231.37,3851.29 5231.37,3886.73 5266.8,3886.73 5266.8,3957.59 5231.37,3957.59 5231.37,3922.15 5160.51,3922.15 5160.51,3957.59 5195.94,3957.59 5195.94,3993.02 5160.51,3993.02 5160.51,4028.46 5231.37,4028.46 5231.37,3993.02 5266.81,3993.02 5266.81,4028.46 5302.24,4028.46 5337.68,4028.46 5337.68,3993.02 5302.24,3993.02 5302.24,3922.15 5337.68,3922.15 5337.68,3957.58 5373.11,3957.58 5373.11,3922.15 5408.54,3922.15 5408.54,3993.02 5373.11,3993.02 5373.11,4028.45 5443.97,4028.45 5443.97,3993.02 5479.41,3993.02 5479.41,4028.45 5550.27,4028.45 5550.27,3993.02 5514.84,3993.02 5514.84,3957.59 5550.27,3957.59 5550.27,3922.15 5479.41,3922.15 5479.41,3957.59 5443.97,3957.59 5443.97,3886.72 5443.97,3851.29 5479.4,3851.29 5479.4,3886.73 5550.27,3886.73 5550.27,3851.29 5514.84,3851.29 5514.84,3815.86 5550.27,3815.86 5550.27,3780.42 5479.4,3780.42 5479.4,3815.86 5443.96,3815.86 5443.96,3780.42 5373.1,3780.42 5373.1,3815.86 5408.53,3815.86 5408.53,3886.73 5373.1,3886.73 5373.1,3851.3 5337.66,3851.3 5337.66,3886.73 5302.23,3886.73 5302.23,3815.86 5337.66,3815.86 5337.66,3780.43 5302.23,3780.44 5302.23,3745 5337.67,3745 5337.67,3709.56 5302.23,3709.56 5302.23,3638.69 5337.67,3638.69 5337.67,3674.13 5373.1,3674.13 5373.1,3638.69 5408.53,3638.69 5408.53,3709.56 5373.1,3709.56 5373.1,3744.99 5443.97,3744.99 5443.97,3709.56 5479.4,3709.56 5479.4,3745 5550.27,3745 5550.27,3709.56 5514.84,3709.56 5514.84,3674.13 5550.27,3674.13 5550.27,3638.69 5479.4,3638.69 5479.4,3674.13 5443.96,3674.13 5443.96,3603.27 5443.96,3567.83 5479.4,3567.83 5479.4,3603.27 5550.26,3603.27 5550.26,3567.83 5514.83,3567.83 5514.83,3532.4 5550.26,3532.4 5550.26,3496.96 5479.4,3496.96 5479.4,3532.4 5443.96,3532.4 5443.96,3496.96 5373.09,3496.96 5373.09,3532.4 5408.52,3532.4 5408.52,3603.27 5373.09,3603.27 5373.09,3567.83 5337.66,3567.83 5337.66,3603.27 5302.23,3603.27 5302.23,3532.4 5337.66,3532.4 5337.66,3496.97 5266.79,3496.97 5266.8,3532.4 5231.36,3532.4 5231.36,3496.97 5160.5,3496.97 5160.5,3532.4 5195.93,3532.4 5195.93,3567.83 5160.5,3567.83 5160.5,3603.27 5231.36,3603.27 5231.36,3567.83 5266.8,3567.83 5266.8,3638.7 5231.37,3638.7 5231.37,3674.15 5266.8,3674.15 5266.8,3745 5231.37,3745 5231.37,3709.57 5195.93,3709.57 5195.93,3745 5160.5,3745 5160.5,3674.15 5195.93,3674.15 5195.93,3638.71 5160.5,3638.71 5089.63,3638.71 5089.63,3674.15 5125.07,3674.15 5125.07,3745.02 5089.63,3745.02 5089.63,3709.58 5054.2,3709.58 5054.2,3745.02 5018.77,3745.02 5018.77,3674.15 5054.2,3674.15 5054.2,3638.71 5018.77,3638.71 5018.77,3567.85 5054.2,3567.85 5054.2,3603.28 5125.07,3603.28 5125.07,3567.85 5089.64,3567.85 5089.64,3532.41 5125.07,3532.41 5125.07,3496.98 5054.2,3496.98 5054.2,3532.41 5018.76,3532.41 5018.76,3496.98 5018.76,3461.55 5054.2,3461.55 5054.2,3426.11 5018.76,3426.11 5018.76,3355.24 5054.2,3355.24 5054.2,3390.68 5089.63,3390.68 5089.63,3355.24 5125.06,3355.24 5125.06,3426.11 5089.63,3426.11 5089.63,3461.54 5160.5,3461.54 5160.5,3426.11 5195.93,3426.11 5195.93,3461.55 5266.8,3461.55 5266.8,3426.11 5231.36,3426.11 5231.36,3390.68 5266.8,3390.68 5266.8,3355.24 5195.93,3355.24 5195.93,3390.68 5160.49,3390.68 5160.49,3319.81 5160.49,3284.38 5195.93,3284.38 5195.93,3319.82 5266.79,3319.82 5266.79,3284.38 5231.36,3284.38 5231.36,3248.95 5266.79,3248.95 5266.79,3213.52 5195.93,3213.52 5195.93,3248.95 5160.49,3248.95 5160.49,3213.52 5089.62,3213.52 5089.62,3248.96 5125.05,3248.96 5125.05,3319.82 5089.62,3319.82 5089.62,3284.39 5054.19,3284.39 5054.19,3319.82 5018.75,3319.82 5018.75,3248.96 5054.19,3248.96 5054.19,3213.52 5018.75,3213.52 5018.75,3142.66 5054.19,3142.66 5054.19,3178.09 5125.05,3178.09 5125.05,3142.66 5089.62,3142.66 5089.62,3107.22 5125.05,3107.22 5125.05,3071.79 5054.19,3071.79 5054.19,3107.22 5018.75,3107.22 5018.75,3036.36 5054.18,3036.36 5054.18,3000.92 5018.75,3000.92 5018.75,2930.05 5054.18,2930.05 5054.18,2965.49 5089.61,2965.49 5089.61,2930.05 5125.05,2930.05 5125.05,3000.92 5089.61,3000.92 5089.61,3036.35 5125.05,3036.35 5195.91,3036.35 5195.91,3000.91 5160.48,3000.91 5160.48,2930.05 5195.91,2930.05 5195.91,2965.48 5231.35,2965.48 5231.35,2930.05 5266.78,2930.05 5266.78,3000.91 5231.35,3000.91 5231.35,3036.35 5266.78,3036.35 5266.78,3107.21 5231.34,3107.21 5231.34,3071.78 5160.48,3071.78 5160.48,3107.21 5195.91,3107.21 5195.91,3142.64 5160.48,3142.64 5160.48,3178.08 5231.34,3178.08 5231.34,3142.64 5266.78,3142.64 5266.78,3178.08 5302.22,3178.08 5302.21,3142.65 5337.65,3142.65 5337.65,3178.08 5408.51,3178.08 5408.51,3142.65 5373.08,3142.65 5373.08,3107.22 5408.51,3107.22 5408.51,3071.78 5337.65,3071.78 5337.65,3107.22 5302.21,3107.22 5302.21,3036.35 5337.64,3036.35 5337.64,3000.91 5302.21,3000.91 5302.21,2930.05 5337.64,2930.05 5337.64,2965.48 5373.07,2965.48 5373.07,2930.05 5408.51,2930.05 5408.51,3000.91 5373.07,3000.91 5373.07,3036.34 5408.51,3036.34 5479.38,3036.34 5479.38,3000.9 5443.94,3000.9 5443.94,2930.04 5479.38,2930.04 5479.38,2965.47 5514.8,2965.47 5514.8,2930.04 5550.24,2930.04 5550.24,3000.9 5514.8,3000.9 5514.8,3036.34 5550.24,3036.34 5550.24,3107.21 5514.8,3107.21 5514.8,3071.77 5443.94,3071.77 5443.94,3107.21 5479.37,3107.21 5479.37,3142.64 5443.94,3142.64 5443.94,3178.07 5514.8,3178.07 5514.8,3142.64 5550.24,3142.64 5550.24,3178.07 ; 5550.24,3178.08 5550.24,3213.51 5514.81,3213.51 5514.81,3248.95 5550.24,3248.95 5550.24,3319.81 5514.81,3319.81 5514.81,3284.38 5479.38,3284.38 5479.38,3319.81 5443.94,3319.81 5443.94,3248.95 5479.38,3248.95 5479.38,3213.51 5408.51,3213.51 5408.51,3248.94 5373.07,3248.94 5373.07,3213.51 5302.21,3213.51 5302.21,3248.94 5337.64,3248.94 5337.64,3284.38 5302.21,3284.38 5302.21,3319.81 5373.07,3319.81 5373.07,3284.38 5408.51,3284.38 5408.51,3355.24 5408.51,3390.68 5373.08,3390.68 5373.08,3355.24 5302.22,3355.24 5302.22,3390.68 5337.65,3390.68 5337.65,3426.11 5302.22,3426.11 5302.22,3461.54 5373.08,3461.54 5373.08,3426.11 5408.52,3426.11 5408.52,3461.54 5479.39,3461.54 5479.39,3426.1 5443.95,3426.1 5443.95,3355.24 5479.39,3355.24 5479.39,3390.67 5514.82,3390.67 5514.82,3355.24 5550.26,3355.24 5550.26,3426.1 5514.82,3426.1 5514.82,3461.53 5585.68,3461.53 5621.12,3461.53 5621.12,3426.09 5585.68,3426.09 5585.68,3355.23 5621.12,3355.23 5621.12,3390.66 5656.55,3390.66 5656.55,3355.23 5691.99,3355.23 5691.99,3426.09 5656.55,3426.09 5656.55,3461.53 5727.42,3461.53 5727.42,3426.09 5762.85,3426.09 5762.85,3461.53 5833.72,3461.53 5833.72,3426.09 5798.28,3426.09 5798.28,3390.66 5833.72,3390.66 5833.72,3355.23 5762.85,3355.23 5762.85,3390.66 5727.41,3390.66 5727.41,3319.79 5727.41,3284.36 5762.85,3284.36 5762.85,3319.8 5833.71,3319.8 5833.71,3284.36 5798.28,3284.36 5798.28,3248.93 5833.71,3248.93 5833.71,3213.49 5762.85,3213.49 5762.85,3248.93 5727.41,3248.93 5727.41,3213.49 5656.54,3213.49 5656.54,3248.93 5691.98,3248.93 5691.98,3319.8 5656.54,3319.8 5656.54,3284.37 5621.11,3284.37 5621.11,3319.8 5585.68,3319.8 5585.68,3248.93 5621.11,3248.93 5621.11,3213.5 5585.68,3213.5 5585.68,3142.63 5621.11,3142.63 5621.11,3178.07 5691.97,3178.07 5691.97,3142.63 5656.54,3142.63 5656.54,3107.2 5691.97,3107.2 5691.97,3071.77 5621.11,3071.77 5621.11,3107.2 5585.67,3107.2 5585.67,3036.34 5621.1,3036.33 5621.1,3000.89 5585.67,3000.89 5585.67,2930.03 5621.1,2930.03 5621.1,2965.47 5656.54,2965.47 5656.54,2930.03 5691.97,2930.03 5691.97,3000.89 5656.54,3000.89 5656.54,3036.33 5691.97,3036.33 5762.84,3036.33 5762.84,3000.89 5727.4,3000.89 5727.4,2930.03 5762.84,2930.03 5762.84,2965.46 5798.27,2965.46 5798.27,2930.03 5833.7,2930.03 5833.7,3000.89 5798.27,3000.89 5798.27,3036.32 5833.7,3036.32 5833.7,3107.19 5798.27,3107.19 5798.27,3071.76 5727.4,3071.76 5727.4,3107.19 5762.84,3107.19 5762.84,3142.62 5727.4,3142.62 5727.4,3178.06 5798.27,3178.06 5798.27,3142.62 5833.7,3142.62 5833.7,3178.06 5869.14,3178.06 5869.13,3142.63 5904.57,3142.63 5904.57,3178.06 5975.43,3178.06 5975.43,3142.63 5940,3142.63 5940,3107.19 5975.43,3107.19 5975.43,3071.76 5904.57,3071.76 5904.57,3107.19 5869.13,3107.19 5869.13,3036.33 5904.56,3036.33 5904.56,3000.89 5869.13,3000.89 5869.13,2930.03 5904.56,2930.03 5904.56,2965.45 5939.99,2965.45 5939.99,2930.03 5975.43,2930.03 5975.43,3000.89 5939.99,3000.89 5939.99,3036.32 5975.43,3036.32 6046.3,3036.32 6046.3,3000.89 6010.86,3000.89 6010.86,2930.02 6046.3,2930.02 6046.3,2965.45 6081.73,2965.45 6081.73,2930.02 6117.16,2930.02 6117.16,3000.89 6081.73,3000.89 6081.73,3036.32 6117.16,3036.32 6117.16,3107.18 6081.72,3107.18 6081.72,3071.75 6010.86,3071.75 6010.86,3107.18 6046.29,3107.18 6046.29,3142.62 6010.86,3142.62 6010.86,3178.05 6081.72,3178.05 6081.72,3142.62 6117.16,3142.62 6117.16,3178.05 6117.16,3213.48 6081.73,3213.48 6081.73,3248.92 6117.16,3248.92 6117.16,3319.79 6081.73,3319.79 6081.73,3284.36 6046.3,3284.36 6046.3,3319.79 6010.86,3319.79 6010.86,3248.92 6046.3,3248.92 6046.3,3213.49 5975.43,3213.49 5975.43,3248.92 5939.99,3248.92 5939.99,3213.49 5869.13,3213.49 5869.13,3248.92 5904.56,3248.92 5904.56,3284.35 5869.13,3284.35 5869.13,3319.79 5939.99,3319.79 5939.99,3284.35 5975.43,3284.35 5975.43,3355.22 5975.43,3390.65 5940,3390.65 5940,3355.22 5869.14,3355.22 5869.14,3390.65 5904.57,3390.65 5904.57,3426.09 5869.14,3426.09 5869.14,3461.52 5940,3461.52 5940,3426.09 5975.44,3426.09 5975.44,3461.52 6046.31,3461.52 6046.31,3426.08 6010.87,3426.08 6010.87,3355.22 6046.31,3355.22 6046.31,3390.65 6081.74,3390.65 6081.74,3355.22 6117.18,3355.22 6117.18,3426.08 6081.74,3426.08 6081.74,3461.51 6117.17,3461.51 6117.18,3532.38 6081.74,3532.38 6081.74,3496.95 6010.88,3496.95 6010.88,3532.38 6046.31,3532.38 6046.31,3567.81 6010.88,3567.81 6010.88,3603.24 6081.74,3603.24 6081.74,3567.81 6117.18,3567.81 6117.18,3638.67
  Top Layer w25.59: 5727.43,4063.87 5727.43,4099.31 5762.87,4099.31 5762.87,4063.87 5833.73,4063.87 5833.73,4099.31 5798.3,4099.31 5798.3,4134.74 5833.73,4134.74 5833.73,4170.18 5762.87,4170.18 5762.87,4134.74 5727.44,4134.74 5727.44,4170.17 5727.44,4241.04 5762.88,4241.04 5762.88,4205.6 5833.74,4205.6 5833.74,4241.04 5798.3,4241.04 5798.3,4276.47 5833.74,4276.47 5833.74,4311.91 5762.88,4311.91 5762.88,4276.47 5727.44,4276.47 5727.44,4311.9 5656.57,4311.9 5656.57,4276.47 5692.01,4276.47 5692.01,4205.6 5656.57,4205.6 5656.57,4241.04 5621.14,4241.04 5621.14,4205.6 5585.71,4205.6 5585.71,4276.47 5621.14,4276.47 5621.14,4311.91 5585.71,4311.91 5585.71,4347.34 5585.71,4382.78 5621.15,4382.78 5621.15,4347.34 5692.01,4347.34 5692.01,4382.78 5656.58,4382.78 5656.58,4418.21 5692.01,4418.21 5692.01,4453.64 5621.15,4453.64 5621.15,4418.21 5585.71,4418.21 5585.71,4489.08 5621.14,4489.08 5621.14,4524.51 5585.71,4524.51 5585.71,4595.37 5621.14,4595.37 5621.14,4559.94 5656.58,4559.94 5656.58,4595.37 5692.01,4595.37 5692.01,4524.51 5656.58,4524.51 5656.58,4489.07 5727.44,4489.07 5762.88,4489.07 5762.88,4524.5 5727.44,4524.5 5727.44,4595.36 5762.88,4595.36 5762.88,4559.94 5798.3,4559.94 5798.3,4595.36 5833.74,4595.36 5833.74,4524.5 5798.3,4524.5 5798.3,4489.07 5833.74,4489.07 5833.74,4418.2 5798.3,4418.2 5798.3,4453.63 5727.44,4453.63 5727.44,4418.2 5762.87,4418.2 5762.87,4382.77 5727.44,4382.77 5727.44,4347.33 5798.3,4347.33 5798.3,4382.77 5833.73,4382.77 5833.73,4347.34 5869.16,4347.34 5869.16,4382.77 5904.6,4382.77 5904.6,4347.34 5975.47,4347.34 5975.47,4382.77 5940.04,4382.77 5940.04,4418.2 5975.47,4418.2 5975.47,4453.63 5904.6,4453.63 5904.6,4418.2 5869.17,4418.2 5869.17,4489.07 5904.6,4489.07 5904.6,4524.5 5869.17,4524.5 5869.17,4595.36 5904.6,4595.36 5904.6,4559.94 5940.03,4559.94 5940.03,4595.36 5975.47,4595.36 5975.47,4524.5 5940.03,4524.5 5940.03,4489.06 6010.9,4489.06 6046.33,4489.06 6046.33,4524.5 6010.9,4524.5 6010.9,4595.36 6046.33,4595.36 6046.33,4559.93 6081.77,4559.93 6081.77,4595.36 6117.2,4595.36 6117.2,4524.5 6081.77,4524.5 6081.77,4489.06 6117.2,4489.06 6117.2,4418.19 6081.76,4418.19 6081.76,4453.62 6010.9,4453.62 6010.9,4418.19 6046.33,4418.19 6046.33,4382.76 6010.9,4382.76 6010.9,4347.32 6081.76,4347.32 6081.76,4382.76 6117.2,4382.76 6117.19,4311.89 6081.76,4311.89 6081.76,4276.46 6117.2,4276.46 6117.2,4205.6 6081.76,4205.6 6081.76,4241.03 6046.33,4241.03 6046.33,4205.6 6010.89,4205.6 6010.89,4276.46 6046.33,4276.46 6046.33,4311.9 5975.46,4311.9 5975.46,4276.47 5940.02,4276.47 5940.02,4311.9 5869.16,4311.9 5869.16,4276.47 5904.59,4276.47 5904.59,4241.03 5869.16,4241.03 5869.16,4205.6 5940.02,4205.6 5940.02,4241.03 5975.46,4241.03 5975.46,4205.6 5975.46,4134.73 5940.02,4134.73 5940.02,4170.17 5869.15,4170.17 5869.15,4134.73 5904.58,4134.73 5904.58,4099.3 5869.15,4099.3 5869.15,4063.87 5940.02,4063.87 5940.02,4099.3 5975.45,4099.3 5975.45,4063.87 6046.32,4063.87 6046.32,4099.3 6010.88,4099.3 6010.88,4170.17 6046.32,4170.17 6046.32,4134.73 6081.75,4134.73 6081.75,4170.17 6117.19,4170.17 6117.19,4099.3 6081.75,4099.3 6081.75,4063.87 6117.19,4063.87 6117.19,4028.43 6117.19,3993 6081.75,3993 6081.75,4028.43 6010.89,4028.43 6010.89,3993 6046.32,3993 6046.32,3957.57 6010.89,3957.57 6010.89,3922.13 6081.75,3922.13 6081.75,3957.57 6117.18,3957.57 6117.18,3886.7 6081.75,3886.7 6081.75,3851.27 6117.19,3851.27 6117.19,3780.4 6081.75,3780.4 6081.75,3815.83 6046.32,3815.83 6046.32,3780.4 6010.89,3780.4 6010.89,3851.27 6046.32,3851.27 6046.32,3886.7 5975.45,3886.7 5940.02,3886.7 5940.02,3851.27 5975.45,3851.27 5975.45,3780.41 5940.02,3780.41 5940.02,3815.84 5904.59,3815.84 5904.59,3780.41 5869.15,3780.41 5869.15,3851.27 5904.59,3851.27 5904.59,3886.71 5869.15,3886.71 5869.15,3957.57 5904.59,3957.57 5904.59,3922.14 5975.45,3922.14 5975.45,3957.57 5940.02,3957.57 5940.02,3993.01 5975.45,3993.01 5975.45,4028.44 5904.59,4028.44 5904.59,3993.01 5869.16,3993.01 5869.16,4028.44 5798.3,4028.44 5798.3,3993.01 5833.73,3993.01 5833.73,3922.14 5798.3,3922.14 5798.3,3957.57 5762.86,3957.57 5762.86,3922.14 5727.43,3922.14 5727.43,3993.01 5762.86,3993.01 5762.86,4028.45 5692,4028.45 5692,3993.01 5656.56,3993.01 5656.56,4028.45 5585.69,4028.45 5585.69,3993.01 5621.13,3993.01 5621.13,3957.58 5585.69,3957.58 5585.69,3922.14 5656.56,3922.14 5656.56,3957.58 5691.99,3957.58 5691.99,3922.15 5691.99,3851.28 5656.55,3851.28 5656.55,3886.72 5585.69,3886.72 5585.69,3851.28 5621.12,3851.28 5621.12,3815.85 5585.69,3815.85 5585.69,3780.42 5656.55,3780.42 5656.55,3815.85 5691.99,3815.85 5691.99,3780.42 5762.85,3780.42 5762.85,3815.85 5727.42,3815.85 5727.42,3886.72 5762.85,3886.72 5762.85,3851.28 5798.28,3851.28 5798.28,3886.72 5833.72,3886.72 5833.72,3815.85 5798.28,3815.85 5798.28,3780.41 5833.72,3780.41 5833.72,3744.98 5798.28,3744.98 5798.28,3709.55 5833.72,3709.55 5833.72,3638.69 5798.28,3638.69 5798.28,3674.12 5762.85,3674.12 5762.85,3638.69 5727.42,3638.69 5727.42,3709.55 5762.85,3709.55 5762.85,3744.99 5691.99,3744.99 5691.99,3709.55 5656.55,3709.55 5656.55,3744.99 5585.69,3744.99 5585.69,3709.55 5621.12,3709.55 5621.12,3674.12 5585.69,3674.12 5585.69,3638.69 5656.55,3638.69 5656.55,3674.12 5691.98,3674.12 5691.98,3638.69 5691.98,3567.82 5656.55,3567.82 5656.55,3603.26 5585.68,3603.26 5585.68,3567.82 5621.11,3567.82 5621.11,3532.39 5585.68,3532.39 5585.68,3496.95 5656.55,3496.95 5656.55,3532.39 5691.98,3532.39 5691.98,3496.96 5762.85,3496.96 5762.85,3532.39 5727.41,3532.39 5727.41,3603.26 5762.85,3603.26 5762.85,3567.82 5798.27,3567.82 5798.27,3603.26 5833.72,3603.26 5833.72,3532.39 5798.27,3532.39 5798.27,3496.95 5833.72,3496.95 5869.14,3496.95 5869.14,3532.39 5904.58,3532.39 5904.58,3496.95 5975.45,3496.95 5975.45,3532.39 5940.01,3532.39 5940.01,3567.82 5975.45,3567.82 5975.45,3603.25 5904.58,3603.25 5904.58,3567.82 5869.15,3567.82 5869.15,3638.69 5904.58,3638.69 5904.58,3674.12 5869.14,3674.12 5869.14,3744.99 5904.58,3744.99 5904.58,3709.55 5940.01,3709.55 5940.01,3744.99 5975.45,3744.99 5975.45,3674.12 5940.01,3674.12 5940.01,3638.68 6010.88,3638.68 6046.31,3638.68 6046.31,3674.12 6010.88,3674.12 6010.88,3744.98 6046.31,3744.98 6046.31,3709.55 6081.74,3709.55 6081.74,3744.98 6117.18,3744.98 6117.18,3674.12 6081.74,3674.12 6081.74,3638.68 6117.18,3638.68

## Keep-outs
Keep-Out Layer:
  lines w10: 1505,6359.33 ccw(c1505,6426.26) 1571.93,6426.26 ; 6162.48,6426.26 ccw(c6229.41,6426.26) 6229.41,6359.33

## Silkscreen, mask and mechanical layers (free items; w line width, h text height)
Document:
  lines w0.1: 3866.2,3964.65 3868.2,3966.65